# Altium PCB EE52_Digital_Oscilloscope.PcbDoc (part 1 of 5)
Units mil, origin at the board's own origin, x right, y up, seen from the top; angles counter-clockwise.
Board outline 7431 x 5662 mil, 2 copper layers (Top Layer, Bottom Layer); 305 components, 396 nets, 1532 pads, 389 vias.
Unrouted connection lines stored in the file: 2.
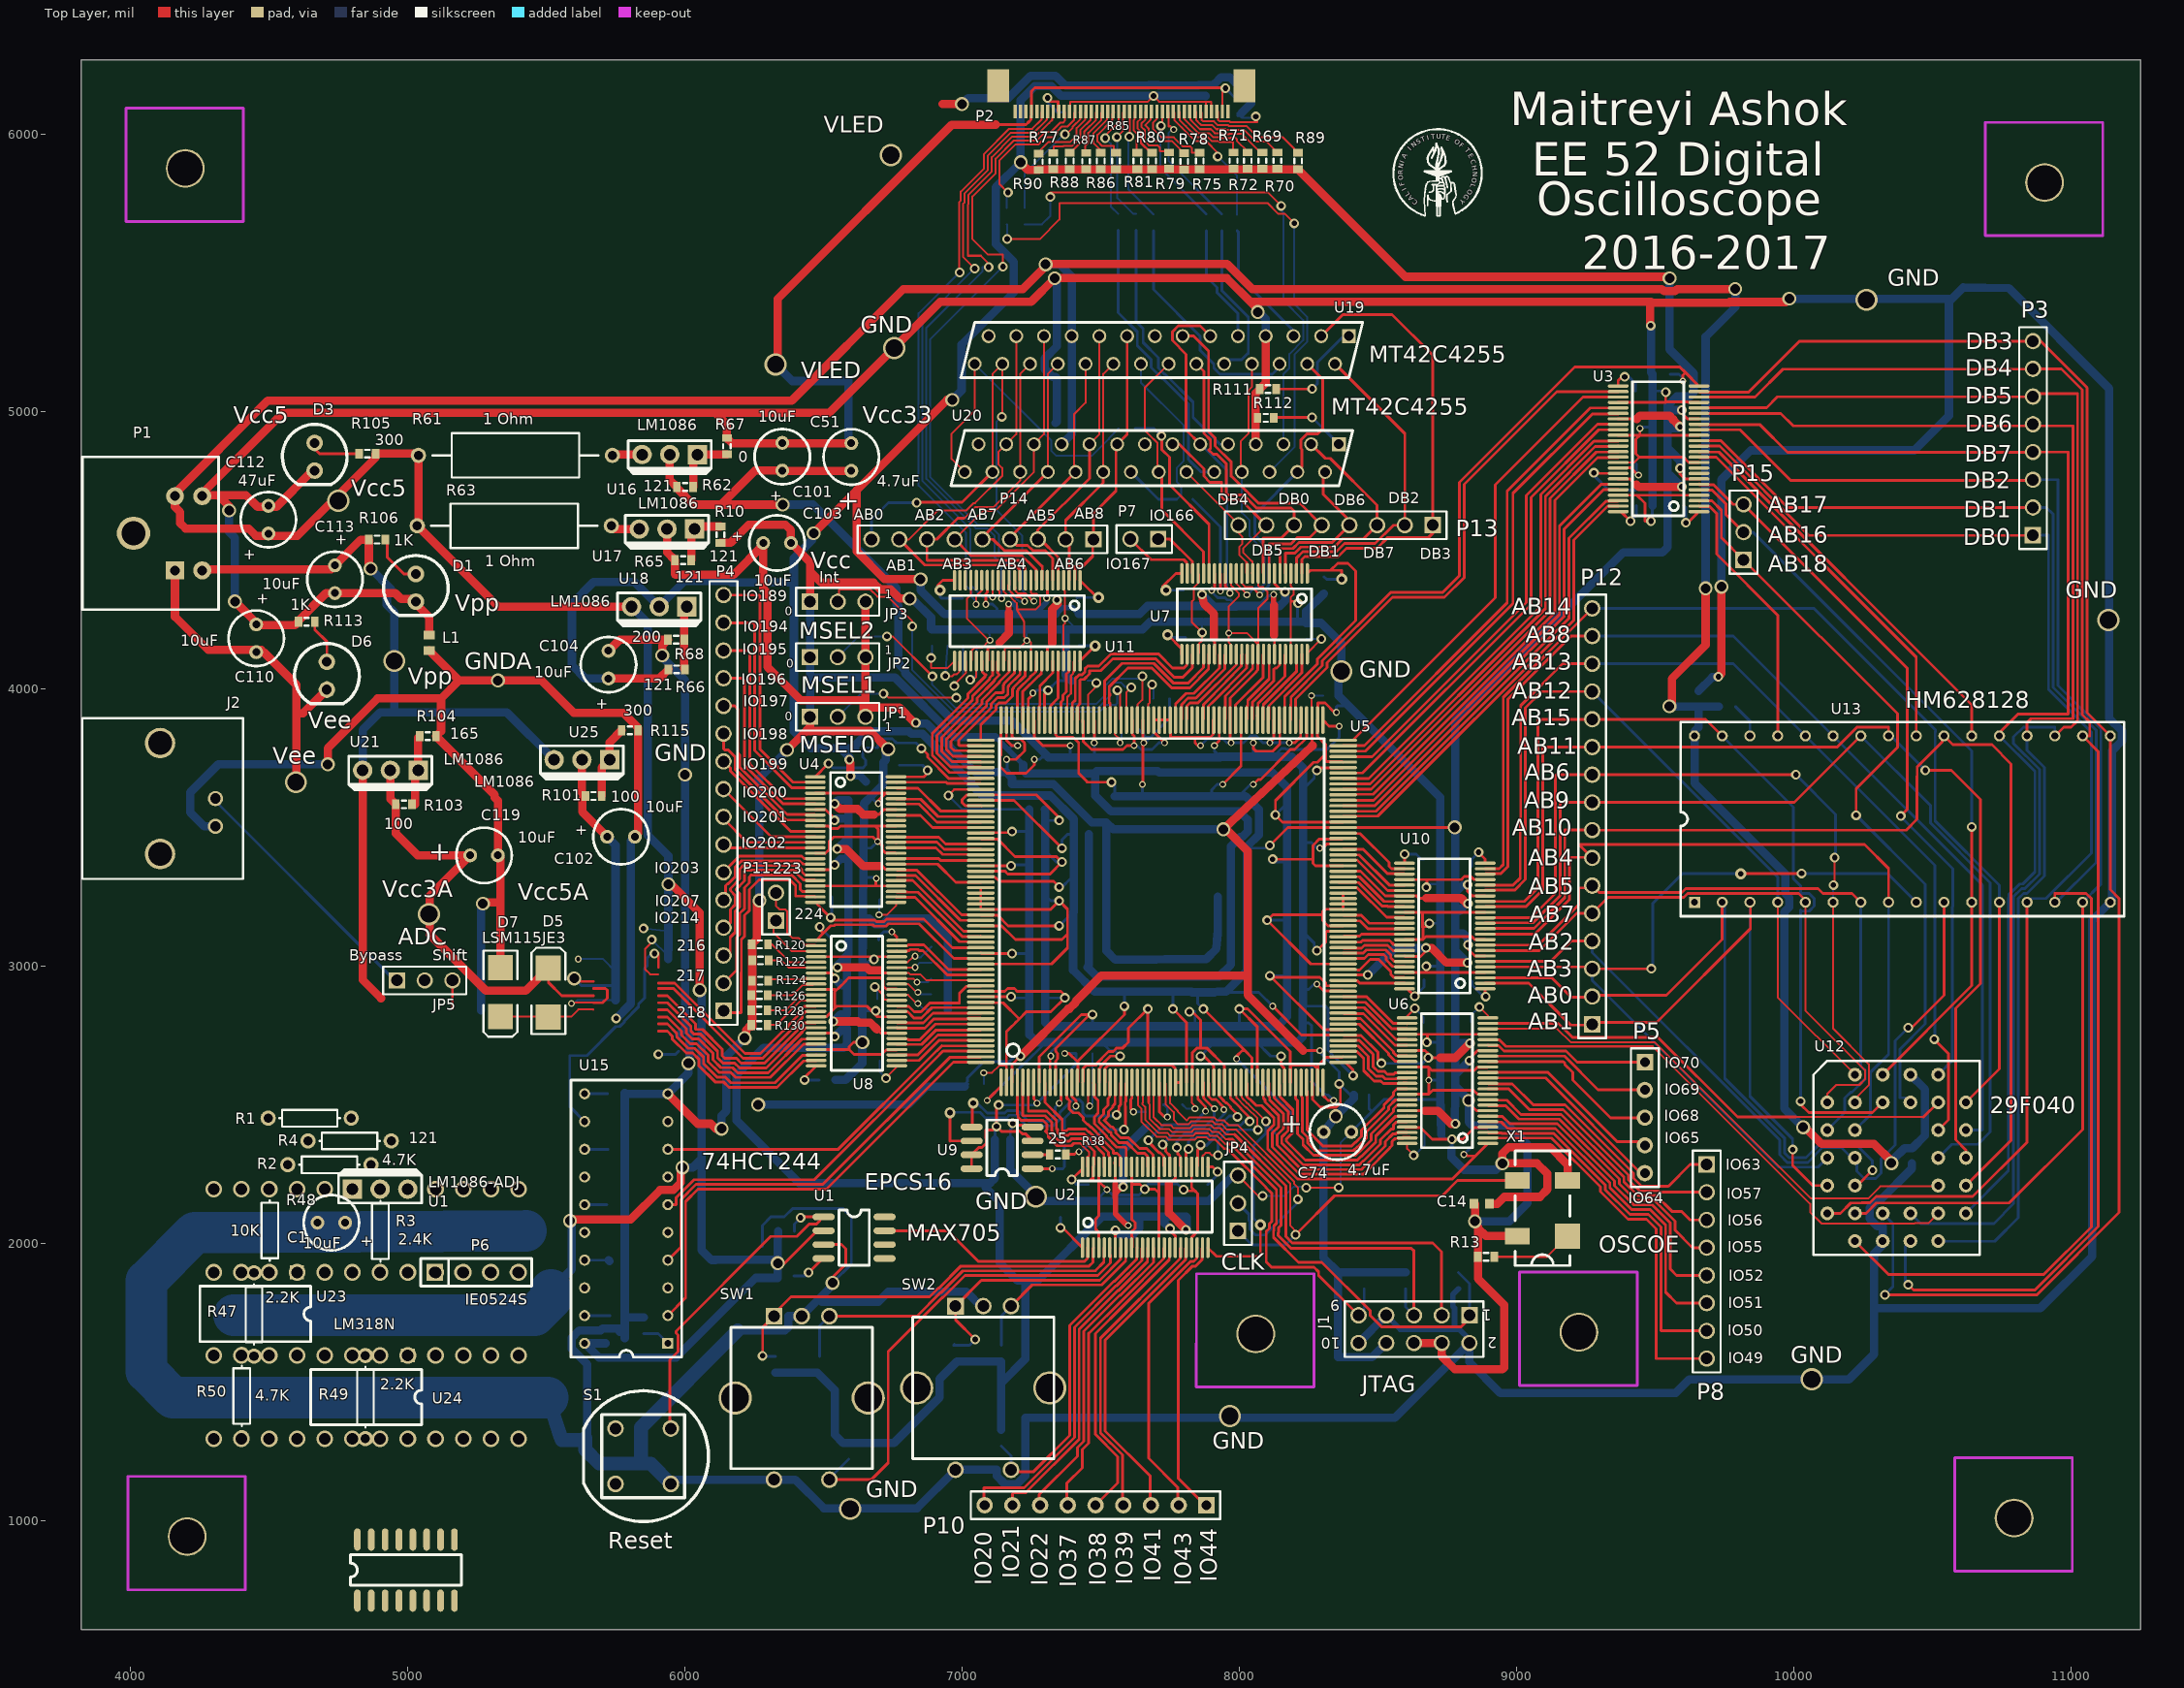
[diagram p0: Top Layer view]
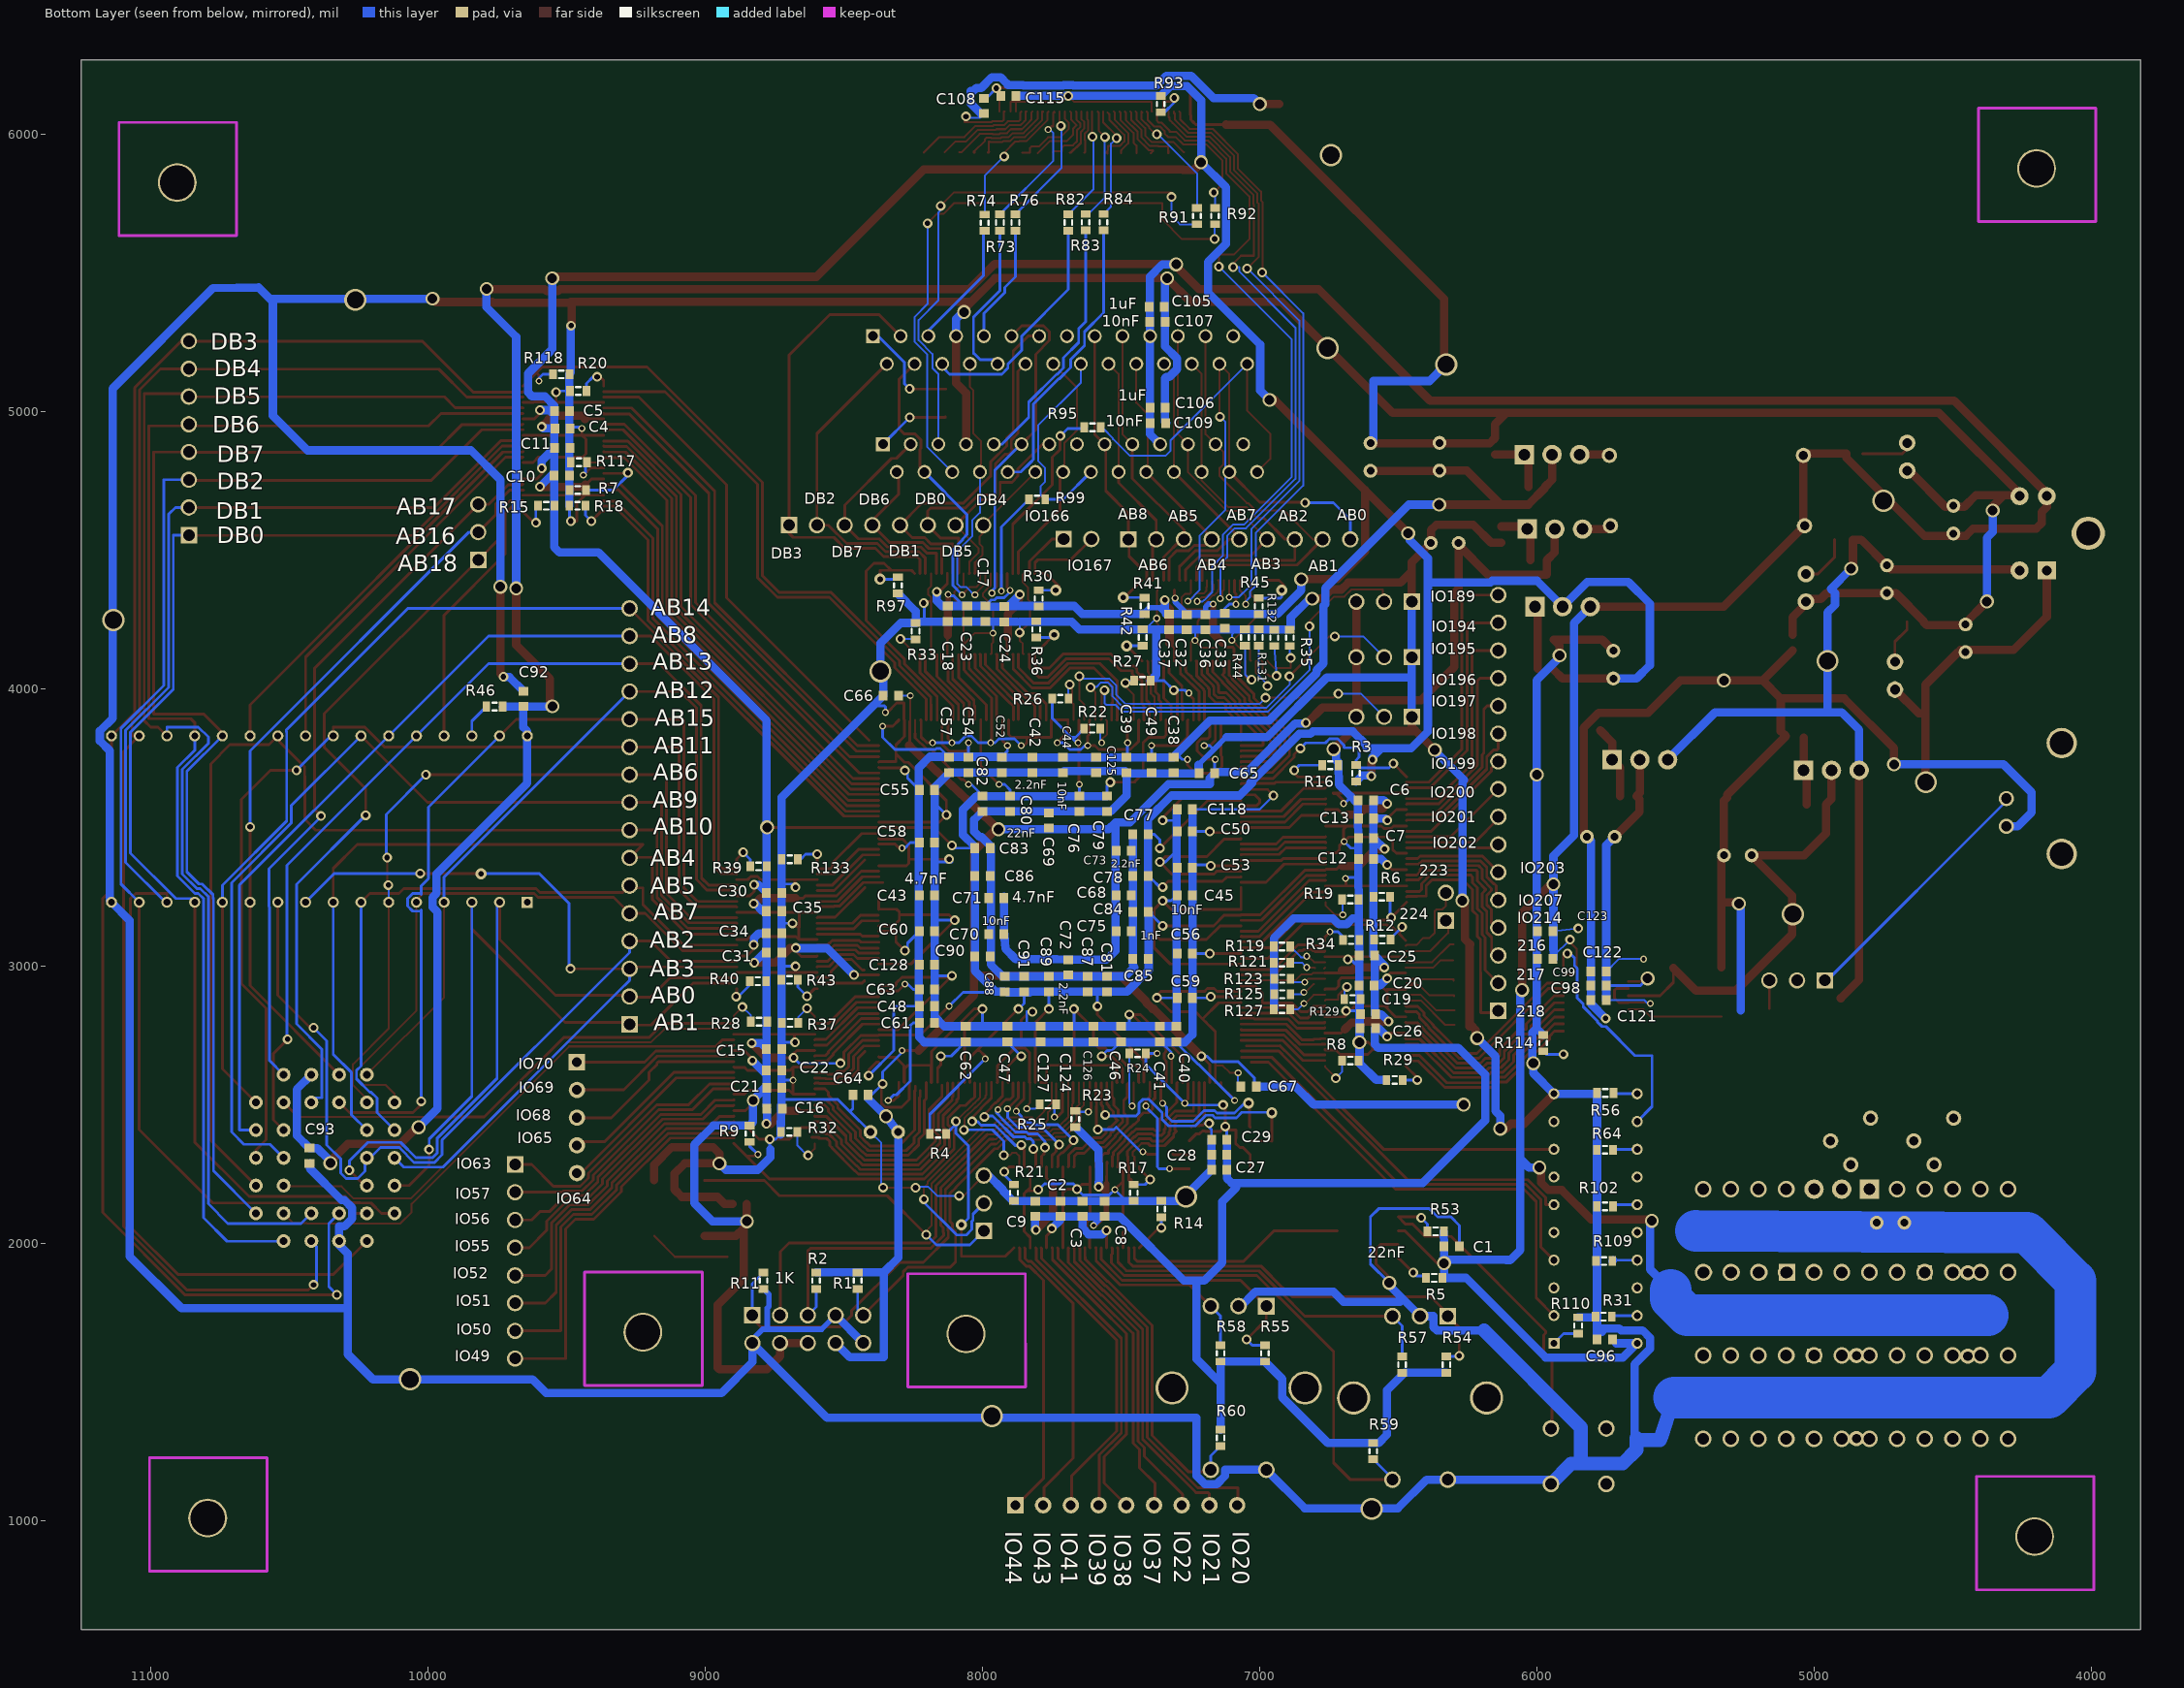
[diagram p1: Bottom Layer view, seen from below]

## Layer stack, top to bottom
Top Solder: solder mask 0.4, Solder Resist, Dk 3.5
Top Layer: signal copper 1.4
Dielectric 1: dielectric 12.6, FR-4, Dk 4.8
Bottom Layer: signal copper 1.4
Bottom Solder: solder mask 0.4, Solder Resist, Dk 3.5

## Board outline
3821,6269 11252,6269 11252,607 3821,607

## Design rules (kind name [scope] priority, off if disabled: settings)
Clearance [All] p1: gap=7
HoleSize [All] p1: absolutevalues=TRUE maxlimit=250 minlimit=20 maxpercent=80.000 minpercent=20.000
MinimumSolderMaskSliver [All] p1 off: minsoldermaskwidth=3
PlaneConnect [All] p1: planeconnectstyle=Relief reliefexpansion=15 reliefentries=4 reliefconductorwidth=10 reliefairgap=10
PolygonConnect [All] p1: connectstyle=Relief reliefconductorwidth=10 reliefentries=4 polygonreliefangle="90 Angle" airgapwidth=10
RoutingCorners [All] p1: cornerstyle=45-Degree minsetback=10 maxsetback=100
RoutingTopology [All] p1: topology=Daisy_Balanced
RoutingVias RoutingVias_1 [All] p1: holewidth=28 width=50 viastyle="Through Hole" minholewidth=15 minwidth=25 maxholewidth=28 maxwidth=50
RoutingVias [All] p2: holewidth=20 width=35 viastyle="Through Hole" minholewidth=15 minwidth=25 maxholewidth=28 maxwidth=50
SilkToSilkClearance [All] p1: silktosilkclearance=6
SilkToSolderMaskClearance [IsPad] p1 off: minsilkscreentomaskgap=3 clearancetoexposedcopper=TRUE
SolderMaskExpansion [All] p1: expansion=2.5
Width [All] p1: maxlimit=30 minlimit=7 preferedwidth=10
23 further rules are at their usual default settings.

## Classes and differential pairs
component class Memory: C92 C93 R46 U12 U13
component class EE52_Digital_Oscilloscope: C1 C2 C3 C4 C5 C6 C7 C8 C9 C10 C11 C12 C13 C14 C15 C16 C17 C18 C19 C20 C21 C22 C23 C24 C25 C26 C27 C28 C29 C30 C31 C32 C33 C34 C35 C36 C37 C38 C39 C40 C41 C42 C43 C44 C45 C46 C47 C48 C49 C50 C51 C52 C53 C54 C55 C56 C57 C58 C59 C60 C61 C62 C63 C64 C65 C66 C67 C68 C69 C70 C71 C72 C73 C74 C75 C76 C77 C78 C79 C80 C81 C82 C83 C84 C85 C86 C87 C88 C89 C90 C91 C101 C103 C104 C110 C112 C113 C118 C124 C125 C126 C127 C128 D1 D3 D6 J1 JP1 JP2 JP3 JP4 L1 P1 P3 P4 P5 P7 P8 P10 P11 P12 P13 P14 P15 R1 R2 R3 R4 R5 R6 R7 R8 R9 R10 R11 R12 R13 R14 R15 R16 R17 R18 R19 R20 R21 R22 R23 R24 R25 R26 R27 R28 R29 R30 R32 R33 R34 R35 R36 R37 R38 R39 R40 R41 R42 R43 R44 R45 R53 R61 R62 R63 R65 R66 R67 R68 R95 R97 R99 R105 R106 R113 R117 R118 R119 R120 R121 R122 R123 R124 R125 R126 R127 R128 R129 R130 R131 R132 R133 S1 U1 U2 U3 U4 U5 U6 U7 U8 U9 U10 U11 U16 U17 U18 X1
component class Input: C96 C98 C99 C102 C119 C121 C122 C123 D5 D7 J2 JP5 R31 R56 R64 R101 R102 R103 R104 R109 R110 R114 R115 U15 U21 U25
component class Output: C105 C106 C107 C108 C109 C115 P2 R54 R55 R57 R58 R59 R60 R69 R70 R71 R72 R73 R74 R75 R76 R77 R78 R79 R80 R81 R82 R83 R84 R85 R86 R87 R88 R89 R90 R91 R92 R93 R111 R112 SW1 SW2 U19 U20

## Components (designator, comment, footprint, x,y, rotation, side; value= is the part's Value field where it differs from the comment)
C1 "Cap" 1608[0603] 6307,1989 r0 bottom
C2 "Cap" 1608[0603] 7719,2124 r270 bottom
C3 "Cap" 1608[0603] 7639,2124 r270 bottom
C4 "Cap" 1608[0603] 9515,4939 r0 bottom
C5 "Cap" 1608[0603] 9517,5002 r0 bottom
C6 "Cap" 1608[0603] 6617,3598 r180 bottom
C7 "Cap" 1608[0603] 6616,3461 r180 bottom
C8 "Cap" 1608[0603] 7559,2124 r270 bottom
C9 "Cap" 1608[0603] 7809,2124 r270 bottom
C10 "Cap" 1608[0603] 9518,4769 r0 bottom
C11 "Cap" 1608[0603] 9516,4869 r0 bottom
C12 "Cap" 1608[0603] 6616,3386 r180 bottom
C13 "Cap" 1608[0603] 6616,3532 r180 bottom
C14 "Cap" 1608[0603] 8874,2142 r180 top
C15 "Cap" 1608[0603] 8752,2700 r0 bottom
C16 "Cap" 1608[0603] 8750,2485 r0 bottom
C17 "Cap" 1608[0603] 7990,4271 r90 bottom
C18 "Cap" 1608[0603] 8125,4271 r90 bottom
C19 "Cap" 1608[0603] 6609,2826 r180 bottom
C20 "Cap" 1608[0603] 6614,2930 r180 bottom
C21 "Cap" 1608[0603] 8751,2561 r0 bottom
C22 "Cap" 1608[0603] 8752,2624 r0 bottom
C23 "Cap" 1608[0603] 8055,4271 r90 bottom
C24 "Cap" 1608[0603] 7921,4269 r90 bottom
C25 "Cap" 1608[0603] 6613,3038 r180 bottom
C26 "Cap" 1608[0603] 6610,2775 r180 bottom
C27 "Cap" 1608[0603] 7146,2265 r180 bottom
C28 "Cap" 1608[0603] 7146,2319 r180 bottom
C29 "Cap" 1608[0603] 7146,2374 r180 bottom
C30 "Cap" 1608[0603] 8752,3263 r0 bottom
C31 "Cap" 1608[0603] 8752,3048 r0 bottom
C32 "Cap" 1608[0603] 7263,4240 r90 bottom
C33 "Cap" 1608[0603] 7125,4245 r90 bottom
C34 "Cap" 1608[0603] 8752,3118 r0 bottom
C35 "Cap" 1608[0603] 8752,3198 r0 bottom
C36 "Cap" 1608[0603] 7195,4240 r90 bottom
C37 "Cap" 1608[0603] 7327,4241 r90 bottom
C38 "Cap" 1608[0603] 7310,3725 r90 bottom
C39 "Cap" 1608[0603] 7480,3725 r90 bottom
C40 "Cap" 1608[0603] 7300,2755 r270 bottom
C41 "Cap" 1608[0603] 7360,2755 r270 bottom
C42 "Cap" 1608[0603] 7820,3725 r90 bottom
C43 "Cap" 1608[0603] 8200,3255 r0 bottom
C44 "Cap" 1608[0603] 7710,3725 r90 bottom
C45 "Cap" 1608[0603] 7270,3255 r180 bottom
C46 "Cap" 1608[0603] 7500,2755 r270 bottom
C47 "Cap" 1608[0603] 7910,2755 r270 bottom
C48 "Cap" 1608[0603] 8200,2855 r0 bottom
C49 "Cap" 1608[0603] 7390,3725 r90 bottom
C50 "Cap" 1608[0603] 7270,3485 r180 bottom
C51 "Cap" RB.1/.2 6600,4886 r270 top
C52 "Cap" 1608[0603] 7930,3725 r90 bottom
C53 "Cap" 1608[0603] 7270,3355 r180 bottom
C54 "Cap" 1608[0603] 8050,3725 r90 bottom
C55 "Cap" 1608[0603] 8200,3635 r0 bottom
C56 "Cap" 1608[0603] 7270,3045 r180 bottom
C57 "Cap" 1608[0603] 8120,3725 r90 bottom
C58 "Cap" 1608[0603] 8200,3445 r0 bottom
C59 "Cap" 1608[0603] 7270,2885 r180 bottom
C60 "Cap" 1608[0603] 8200,3125 r0 bottom
C61 "Cap" 1608[0603] 8200,2795 r0 bottom
C62 "Cap" 1608[0603] 8060,2755 r270 bottom
C63 "Cap" 1608[0603] 8200,2915 r0 bottom
C64 "Cap" 1608[0603] 8440,2535 r180 bottom
C65 "Cap" 1608[0603] 7190,3695 r180 bottom
C66 "Cap" 1608[0603] 8330,3975 r180 bottom
C67 "Cap" 1608[0603] 7040,2565 r180 bottom
C68 "Cap" 1608[0603] 7490,3255 r0 bottom
C69 "Cap" 1608[0603] 7760,3525 r270 bottom
C70 "Cap" 1608[0603] 7950,3115 r180 bottom
C71 "Cap" 1608[0603] 7950,3245 r180 bottom
C72 "Cap" 1608[0603] 7690,2995 r90 bottom
C73 "Cap" 1608[0603] 7490,3415 r0 bottom
C74 "Cap" RB.1/.2 8404,2401 r180 top
C75 "Cap" 1608[0603] 7490,3125 r0 bottom
C76 "Cap" 1608[0603] 7650,3585 r90 bottom
C77 "Cap" 1608[0603] 7430,3475 r180 bottom
C78 "Cap" 1608[0603] 7430,3325 r180 bottom
C79 "Cap" 1608[0603] 7550,3585 r90 bottom
C80 "Cap" 1608[0603] 7900,3585 r90 bottom
C81 "Cap" 1608[0603] 7550,2935 r270 bottom
C82 "Cap" 1608[0603] 8000,3585 r90 bottom
C83 "Cap" 1608[0603] 8000,3425 r0 bottom
C84 "Cap" 1608[0603] 7430,3195 r180 bottom
C85 "Cap" 1608[0603] 7430,3025 r180 bottom
C86 "Cap" 1608[0603] 8000,3325 r0 bottom
C87 "Cap" 1608[0603] 7620,2935 r270 bottom
C88 "Cap" 1608[0603] 7920,2935 r270 bottom
C89 "Cap" 1608[0603] 7760,2935 r270 bottom
C90 "Cap" 1608[0603] 8000,3035 r0 bottom
C91 "Cap" 1608[0603] 7850,2935 r270 bottom
C92 "Cap" 1608[0603] 9656,3964 r270 bottom
C93 "Cap" 1608[0603] 10428,2315.5 r90 bottom
C96 "Cap" 1608[0603] 5755,1653 r180 bottom
C98 "Cap" 1608[0603] 5777,2929 r180 bottom
C99 "Cap" 1608[0603] 5970,3025 r180 bottom
C101 "Cap Pol1" RB.1/.2 6351,4887 r270 top
C102 "Cap Pol1" RB.1/.2 5819,3466 r180 top
C103 "Cap Pol1" RB.1/.2 6382,4526 r180 top
C104 "Cap Pol1" RB.1/.2 5724,4137 r270 top
C105 "Cap" 1608[0603] 7371,5377 r0 bottom
C106 "Cap" 1608[0603] 7368,5014 r0 bottom
C107 "Cap" 1608[0603] 7369,5323 r0 bottom
C108 "Cap" 1608[0603] 7995,6102 r270 bottom
C109 "Cap" 1608[0603] 7367,4958 r0 bottom
C110 "Cap Pol1" RB.1/.2 4453,4132 r90 top
C112 "Cap Pol1" RB.1/.2 4674,2074 r0 top
C112 "Cap Pol1" RB.1/.2 4497,4660 r270 top
C113 "Cap Pol1" RB.1/.2 4737,4345 r90 top
C115 "Cap" 1608[0603] 7906,6138 r180 bottom
C118 "Cap" 1608[0603] 7270,3565 r180 bottom
C119 "Cap Pol1" RB.1/.2 5325,3399 r180 top
C121 "Cap" 1608[0603] 5777,2877 r180 bottom
C122 "Cap" 1608[0603] 5777,2980 r180 bottom
C123 "Cap" 1608[0603] 5970,3125 r180 bottom
C124 "Cap" 1608[0603] 7690,2755 r270 bottom
C125 "Cap" 1608[0603] 7590,3725 r90 bottom
C126 "Cap" 1608[0603] 7600,2755 r270 bottom
C127 "Cap" 1608[0603] 7790,2755 r270 bottom
C128 "Cap" 1608[0603] 8200,3005 r0 bottom
D1 "LED" LED-T13/4 5029,4314 r90 top
D3 "LED" LED-T13/4 4664,4787 r90 top
D5 "Diode" SMB 5507,2904 r90 top
D6 "LED" LED-T13/4 4708,3997 r90 top
D7 "Diode" SMB 5334,2906 r270 top
J1 "JTAG" HDR2X5 8830,1740 r180 top
J2 "BNC" AMP31-5540 4306,3604 r270 top
JP1 "CLK01" HDR1X3 6451,3899 r0 top
JP2 "CLK01" HDR1X3 6451,4114 r0 top
JP3 "CLK01" HDR1X3 6451,4314 r0 top
JP4 "CLK01" HDR1X3 7995,2044 r90 top
JP5 "CLK01" HDR1X3 4961,2948 r0 top
L1 "Ferrite Bead" FerriteBead 5077,4166 r90 top
P1 "MHDR1X4" MDIN4 4160,4427 r90 top
P2 "MHDR2X20" 40PinZIF 8019,6175 r180 top
P3 "Header 8" HDR1X8 10863,4554 r90 top
P4 "Header 16" HDR1X16 6139,2838 r90 top
P5 "Header 5" HDR1X5 9463,2653 r270 top
P7 "Header 2" HDR1X2 7707,4540 r180 top
P8 "Header 8" HDR1X8 9686,2284 r270 top
P10 "Header 9" HDR1X9#1 7881,1055 r180 top
P11 "Header 2" HDR1X2 6328,3164 r90 top
P12 "Header 16" HDR1X16 9273,2790 r90 top
P13 "Header 8" HDR1X8 8697,4590 r180 top
P14 "Header 9" HDR1X9#2 7473,4539 r180 top
P15 "Header 3" HDR1X3 9819,4465 r90 top
R1 "Res3" J1-0603 8450,1865 r90 bottom
R2 "Res3" J1-0603 8600,1865 r90 bottom
R3 "Res3" J1-0603 6652,3695 r270 bottom
R4 "Res3" J1-0603 8160,2395 r0 bottom
R5 "Res3" J1-0603 6370,1875 r0 bottom
R6 "Res3" J1-0603 6559,3250 r0 bottom
R7 "Res3" J1-0603 9460,4717 r0 bottom
R8 "Res3" J1-0603 6673,2659 r0 bottom
R9 "Res3" J1-0603 8840,2395 r90 bottom
R10 "Res3" J1-0603 6128,4556 r90 top
R11 "Res3" J1-0603 8790,1865 r90 bottom
R12 "Res3" J1-0603 6557,3095 r0 bottom
R13 "Res3" J1-0603 8890,1951 r0 top
R14 "Res3" J1-0603 7355,2123 r90 bottom
R15 "Res3" J1-0603 9574,4660 r180 bottom
R16 "Res3" J1-0603 6745,3724 r0 bottom
R17 "Res3" J1-0603 7454,2182 r90 bottom
R18 "Res3" J1-0603 9461,4660 r180 bottom
R19 "Res3" J1-0603 6673,3240 r0 bottom
R20 "Res3" J1-0603 9458,5074 r180 bottom
R21 "Res3" J1-0603 7886,2182 r90 bottom
R22 "Res3" J1-0603 7604,3856 r0 bottom
R23 "Res3" J1-0603 7665,2448 r270 bottom
R24 "Res3" J1-0603 7440,2685 r180 bottom
R25 "Res3" J1-0603 7764,2501 r180 bottom
R26 "Res3" J1-0603 7719,3964 r0 bottom
R27 "Res3" J1-0603 7423,4029 r0 bottom
R28 "Res3" J1-0603 8806,2799 r180 bottom
R29 "Res3" J1-0603 6513,2589 r0 bottom
R30 "Res3" J1-0603 7797,4326 r270 bottom
R31 "Res3" J1-0603 5759,1735 r180 bottom
R32 "Res3" J1-0603 8697,2402 r180 bottom
R33 "Res3" J1-0603 8241,4208 r270 bottom
R34 "Res3" J1-0603 6670,3094 r0 bottom
R35 "Res3" J1-0603 6891,4184 r270 bottom
R36 "Res3" J1-0603 7806,4214 r270 bottom
R37 "Res3" J1-0603 8694,2795 r180 bottom
R38 "Res3" J1-0603 7345,2320 r180 top
R39 "Res3" J1-0603 8808,3359 r180 bottom
R40 "Res3" J1-0603 8810,2945 r180 bottom
R41 "Res3" J1-0603 7415,4299 r270 bottom
R42 "Res3" J1-0603 7422,4185 r270 bottom
R43 "Res3" J1-0603 8696,2950 r180 bottom
R44 "Res3" J1-0603 7053,4185 r270 bottom
R45 "Res3" J1-0603 7003,4298 r90 bottom
R46 "Res3" J1-0603 9760,3936 r180 bottom
R53 "Res3" J1-0603 6365,2043 r0 bottom
R54 "Res3" J1-0603 6326,1562 r90 bottom
R55 "Res3" J1-0603 6981,1603 r90 bottom
R56 "Res3" J1-0603 5753,2542 r180 bottom
R57 "Res3" J1-0603 6486,1562 r90 bottom
R58 "Res3" J1-0603 7141,1603 r90 bottom
R59 "Res3" J1-0603 6590,1250 r270 bottom
R60 "Res3" J1-0603 7141,1298 r270 bottom
R61 "Res3" AXIAL-0.7 5388,4842 r0 top
R62 "Res3" J1-0603 6000,4728 r180 top
R63 "Res3" AXIAL-0.7 5384,4588 r0 top
R64 "Res3" J1-0603 5754,2337 r180 bottom
R65 "Res3" J1-0603 5993,4464 r180 top
R66 "Res3" J1-0603 5970,4070 r180 top
R67 "Res3" J1-0603 6151,4875 r270 top
R68 "Res3" J1-0603 5968,4177 r0 top
R69 "Res3" J1-0603 8083,5905 r90 top
R70 "Res3" J1-0603 8137,5905 r270 top
R71 "Res3" J1-0603 7979,5905 r90 top
R72 "Res3" J1-0603 8030,5905 r270 top
R73 "Res3" J1-0603 7937,5682 r90 bottom
R74 "Res3" J1-0603 7992,5681 r270 bottom
R75 "Res3" J1-0603 7857,5904 r90 top
R76 "Res3" J1-0603 7881,5682 r270 bottom
R77 "Res3" J1-0603 7329,5903 r90 top
R78 "Res3" J1-0603 7801,5902 r270 top
R79 "Res3" J1-0603 7746,5905 r90 top
R80 "Res3" J1-0603 7685,5904 r270 top
R81 "Res3" J1-0603 7632,5904 r90 top
R82 "Res3" J1-0603 7690,5682 r270 bottom
R83 "Res3" J1-0603 7628,5683 r90 bottom
R84 "Res3" J1-0603 7563,5683 r270 bottom
R85 "Res3" J1-0603 7555,5904 r90 top
R86 "Res3" J1-0603 7500,5904 r270 top
R87 "Res3" J1-0603 7447,5903 r90 top
R88 "Res3" J1-0603 7388,5904 r270 top
R89 "Res3" J1-0603 8212,5904 r90 top
R90 "Res3" J1-0603 7276,5901 r270 top
R91 "Res3" J1-0603 7226,5705 r90 bottom
R92 "Res3" J1-0603 7161,5705 r270 bottom
R93 "Res3" J1-0603 7357,6109 r90 bottom
R95 "Res3" J1-0603 7603,4943 r0 bottom
R97 "Res3" J1-0603 8305,4373 r90 bottom
R99 "Res3" J1-0603 7803,4683 r0 bottom
R101 "Res3" J1-0603 5670,3613 r180 top
R102 "Res3" J1-0603 5754,2133 r180 bottom
R103 "Res3" J1-0603 4986,3583 r180 top
R104 "Res3" J1-0603 5072,3829 r180 top
R105 "Res3" J1-0603 4854,4848 r180 top
R106 "Res3" J1-0603 4889,4538 r0 top
R109 "Res3" J1-0603 5757,1936 r180 bottom
R110 "Res3" J1-0603 5851,1703 r270 bottom
R111 "Res3" J1-0603 8103,5081 r180 top
R112 "Res3" J1-0603 8095,4977 r180 top
R113 "Res3" J1-0603 4635,4242 r180 top
R114 "Res3" J1-0603 5977,2722 r90 bottom
R115 "Res3" J1-0603 5801,3850 r180 top
R117 "Res3" J1-0603 9456,4817 r0 bottom
R118 "Res3" J1-0603 9519,5134 r0 bottom
R119 "Res3" J1-0603 6919,3070 r0 bottom
R120 "Res3" J1-0603 6270,3078 r0 top
R121 "Res3" J1-0603 6919,3012 r0 bottom
R122 "Res3" J1-0603 6272,3020 r0 top
R123 "Res3" J1-0603 6918,2954 r0 bottom
R124 "Res3" J1-0603 6271,2947 r0 top
R125 "Res3" J1-0603 6918,2898 r0 bottom
R126 "Res3" J1-0603 6269,2895 r0 top
R127 "Res3" J1-0603 6919,2844 r0 bottom
R128 "Res3" J1-0603 6268,2840 r0 top
R129 "Res3" J1-0603 6665,2881 r180 bottom
R130 "Res3" J1-0603 6268,2787 r0 top
R131 "Res3" J1-0603 7003,4185 r270 bottom
R132 "Res3" J1-0603 6947,4184 r270 bottom
R133 "Res3" J1-0603 8695,3385 r180 bottom
S1 "SW-PB" EG140X 5949,1132 r180 top
SW1 "SW-ROTARY&PB" ROTENCPB 6321,1737 r0 top
SW2 "SW-ROTARY&PB" ROTENCPB 6976,1773 r0 top
U1 "MAX705" SO-8 6500,2095 r0 top
U2 "74LVT16245" TSSOP48 7434,1984 r0 top
U3 "74LVT16245" TSSOP48 9658,4639 r90 top
U4 "74LVT16245" TSSOP48 6470,3682.44 r270 top
U5 "EP3C25Q240" PQFP240 7140,2580 r90 top
U6 "74LVT16245" TSSOP48 8896.53,2360.06 r90 top
U7 "74LVT16245" TSSOP48 8245,4416 r180 top
U8 "74LVT16245" TSSOP48 6473,3092.44 r270 top
U9 "EPCS16" SO-8 7254,2269 r180 top
U10 "74LVT16245" TSSOP48 8887,2918 r90 top
U11 "74LVT16245" TSSOP48 7425,4391.56 r180 top
U12 "29F040" PLCCS32 10021,2608 r0 top
U13 "628128" DIPS32 9642,3230 r90 top
U15 "74HCT244" DIPS20 5938,1639 r180 top
U16 "LM1086-ADJ" TO-220V 4800,2195 r0 top
U16 "LM1086-ADJ" TO-220V 6045,4845 r180 top
U17 "LM1086-ADJ" TO-220V 6035,4576 r180 top
U18 "LM1086-ADJ" TO-220V 6007,4296 r180 top
U19 "TC524259Z" ZIPS28 8395,5272 r270 top
U20 "TC524259Z" ZIPS28 8359,4882 r270 top
U21 "LM1086-ADJ" TO-220V 5037,3706 r180 top
U25 "LM1086-ADJ" TO-220V 5728,3744 r180 top
X1 "OSCOE" SG636PCE 9184,2026 r90 top
? "Comment" SO-16 4818,711 r90 top
? "Comment" axial-0.3#1 4847,1445 r270 top
? "Comment" axial-0.3#1 4401,1449 r270 top
? "Comment" axial-0.3#1 4445,1743 r270 top
? "Comment" axial-0.3#1 4502,2046 r270 top
? "Comment" axial-0.3#2 4717,2283 r0 top
? "Comment" axial-0.3#1 4790,2369 r180 top
? "Comment" axial-0.3#1 4646,2451 r180 top
? "Comment" sip4 5097,1895 r0 top
? "Comment" DIP8 5000,1595 r270 top
? "Comment" DIP8 4600,1895 r270 top
? "Comment" CITLOGO 8715,5859 r0 top
? "Comment" axial-0.3#1 4901,2043 r270 top

## Footprints (in the part's own frame and the unit in brackets; to place one, negate y for a bottom-side part, rotate by r counter-clockwise, add the part's x,y. Pads: shape width x height; smd on the part's side, far side on the other; paste and mask are expansions set on the pad)
40PinZIF [mm] "LCD Connector Footprint"
  rect 0.3x1.25 smd mask+0.05: 0(1.54,2.375) 1(2.04,2.375) 2(2.54,2.375) 3(3.04,2.375) 4(3.54,2.375) 5(4.04,2.375) 6(4.54,2.375) 7(5.04,2.375) 8(5.54,2.375) 9(6.04,2.375) 10(6.54,2.375) 11(7.04,2.375) 12(7.54,2.375) 13(8.04,2.375) 14(8.54,2.375) 15(9.04,2.375) 16(9.54,2.375) 17(10.04,2.375) 18(10.54,2.375) 19(11.04,2.375) 20(11.54,2.375) 21(12.04,2.375) 22(12.54,2.375) 23(13.04,2.375) 24(13.54,2.375) 25(14.04,2.375) 26(14.54,2.375) 27(15.04,2.375) 28(15.54,2.375) 29(16.04,2.375) 30(16.54,2.375) 31(17.04,2.375) 32(17.54,2.375) 33(18.04,2.375) 34(18.54,2.375) 35(19.04,2.375) 36(19.54,2.375) 37(20.04,2.375) 38(20.54,2.375) 39(21.04,2.375)
  rect 2x3 smd: 40(0,0) 40(22.58,0)
1608[0603] [mm] "Chip Capacitor, Body 1.6x0.8mm, IPC High Density"
  rect 0.8x0.9 smd: 1(-0.7,0) 2(0.7,0)
  body extent -0.87,-0.48 0.87,0.48, height 1.3
AMP31-5540 [mil]
  round 55 hole 38: 1(0,0) 2(100,0)
  round 110 hole 86: ""(-200,-200) ""(200,-200)
  silkscreen extent -290,-480 290,100
axial-0.3#1 [mm] "Axial Device, Thru-Hole; 2 Leads; 0.3 in Pin Spacing"
  round 1.4 hole 0.85: 1(-3.81,0) 2(3.81,0)
  silkscreen extent -2.77,-0.76 2.77,0.76
axial-0.3#2 [mm] "Axial Device, Thru-Hole; 2 Leads; 0.3 in Pin Spacing"
  round 1.4 hole 0.85: 2(3.81,0) ""(-3.81,0)
  silkscreen extent -2.77,-0.76 2.77,0.76
AXIAL-0.7 [mm] "Axial Device, Thru-Hole; 2 Leads; 0.7 in Pin Spacing"
  round 1.4 hole 0.85: 1(-8.89,0) 2(8.89,0)
  silkscreen extent -7.62,-2.03 7.62,2.03
CITLOGO [mil]
  silkscreen extent -159,-154 159,159
DIP8 [mil]
  rect 50x50 hole 35: 1(0,0)
  round 50 hole 35: 2(0,-100) 3(0,-200) 4(0,-300) 5(300,-300) 6(300,-200) 7(300,-100) 8(300,0)
  silkscreen extent 50,-350 250,50
DIPS20 [mil]
  rect 40x40 hole 25: 1(0,0)
  round 40 hole 25: 2(0,-100) 3(0,-200) 4(0,-300) 5(0,-400) 6(0,-500) 7(0,-600) 8(0,-700) 9(0,-800) 10(0,-900) 11(300,-900) 12(300,-800) 13(300,-700) 14(300,-600) 15(300,-500) 16(300,-400) 17(300,-300) 18(300,-200) 19(300,-100) 20(300,0)
  silkscreen extent -50,-950 350,50
DIPS32 [mil]
  rect 40x40 hole 25: 1(0,0)
  round 40 hole 25: 2(0,-100) 3(0,-200) 4(0,-300) 5(0,-400) 6(0,-500) 7(0,-600) 8(0,-700) 9(0,-800) 10(0,-900) 11(0,-1000) 12(0,-1100) 13(0,-1200) 14(0,-1300) 15(0,-1400) 16(0,-1500) 17(600,-1500) 18(600,-1400) 19(600,-1300) 20(600,-1200) 21(600,-1100) 22(600,-1000) 23(600,-900) 24(600,-800) 25(600,-700) 26(600,-600) 27(600,-500) 28(600,-400) 29(600,-300) 30(600,-200) 31(600,-100) 32(600,0)
  silkscreen extent -50,-1550 650,50
EG140X [mil]
  round 60 hole 42: 1(0,0) 2(0,-200) 3(200,0) 4(200,-200)
  silkscreen extent -136,-336 315,136
FerriteBead [mm] "Chip Ferrite Bead, 2-Leads, Body 1.60x0.80mm, IPC Medium Density"
  rect 0.78x1.02 smd: 1(-0.71,0) 2(0.71,0)
  body extent -0.9,-0.5 0.9,0.5, height 1
HDR1X2 [mm] "Connector; Header; 2 Position"
  rect 1.5x1.5 hole 1.067: 1(0,0)
  round 1.5 hole 1.067: 2(2.54,0)
  silkscreen extent -1.27,-1.27 3.81,1.27
HDR1X3 [mm] "Connector; Header; 3 Position"
  rect 1.5x1.5 hole 1.067: 1(0,0)
  round 1.5 hole 1.067: 2(2.54,0) 3(5.08,0)
  silkscreen extent -1.27,-1.27 6.35,1.27
HDR1X5 [mm] "Connector; Header; 5 Position"
  rect 1.5x1.5 hole 0.9: 1(0,0)
  round 1.5 hole 0.9: 2(2.54,0) 3(5.08,0) 4(7.62,0) 5(10.16,0)
  silkscreen extent -1.27,-1.27 11.43,1.27
HDR1X8 [mm] "Connector; Header; 8 Position"
  rect 1.5x1.5 hole 1.067: 1(0,0)
  round 1.5 hole 1.067: 2(2.54,0) 3(5.08,0) 4(7.62,0) 5(10.16,0) 6(12.7,0) 7(15.24,0) 8(17.78,0)
  silkscreen extent -1.27,-1.27 19.05,1.27
HDR1X9#1 [mm] "Connector; Header; 9 Position"
  rect 1.5x1.5 hole 0.9: 1(0,0)
  round 1.5 hole 0.9: 2(2.54,0) 3(5.08,0) 4(7.62,0) 5(10.16,0) 6(12.7,0) 7(15.24,0) 8(17.78,0) 9(20.32,0)
  silkscreen extent -1.27,-1.27 21.59,1.27
HDR1X9#2 [mm] "Connector; Header; 9 Position"
  rect 1.5x1.5 hole 1.067: 1(0,0)
  round 1.5 hole 1.067: 2(2.54,0) 3(5.08,0) 4(7.62,0) 5(10.16,0) 6(12.7,0) 7(15.24,0) 8(17.78,0) 9(20.32,0)
  silkscreen extent -1.27,-1.27 21.59,1.27
HDR1X16 [mm] "Connector; Header; 16 Position"
  rect 1.5x1.5 hole 1.067: 1(0,0)
  round 1.5 hole 1.067: 2(2.54,0) 3(5.08,0) 4(7.62,0) 5(10.16,0) 6(12.7,0) 7(15.24,0) 8(17.78,0) 9(20.32,0) 10(22.86,0) 11(25.4,0) 12(27.94,0) 13(30.48,0) 14(33.02,0) 15(35.56,0) 16(38.1,0)
  silkscreen extent -1.27,-1.27 39.37,1.27
HDR2X5 [mm] "Connector; Header; 5x2 Position"
  rect 1.5x1.5 hole 1.067: 1(0,0)
  round 1.5 hole 1.067: 2(0,2.54) 3(2.54,0) 4(2.54,2.54) 5(5.08,0) 6(5.08,2.54) 7(7.62,0) 8(7.62,2.54) 9(10.16,0) 10(10.16,2.54)
  silkscreen extent -1.27,-1.27 11.43,3.81
J1-0603 [mm] "Chip Resistor, Body 1.6x0.8mm, IPC High Density"
  rect 0.7x0.9 smd: 1(-0.75,0) 2(0.75,0)
  silkscreen extent -0.2,-0.35 0.2,0.35, body extent -0.85,-0.48 0.85,0.48, height 0.9
LED-T13/4 [mil]
  round 60 hole 35: 1(100,0) 2(0,0)
  silkscreen extent -50,-117 167,117
MDIN4 [mil]
  rect 65x65 hole 35: 1(0,0)
  round 65 hole 35: 2(267.72,0) 3(0,-98.42) 4(267.72,-98.42)
  round 120 hole 86: A(133.86,149.61)
  silkscreen extent -142,-157 409,335
PLCCS32 [mil]
  round 50 hole 28: 1(400,-100) 2(300,0) 3(300,-100) 4(200,0) 5(100,-100) 6(200,-100) 7(100,-200) 8(200,-200) 9(100,-300) 10(200,-300) 11(100,-400) 12(200,-400) 13(100,-500) 14(200,-600) 15(200,-500) 16(300,-600) 17(300,-500) 18(400,-600) 19(400,-500) 20(500,-600) 21(600,-500) 22(500,-500) 23(600,-400) 24(500,-400) 25(600,-300) 26(500,-300) 27(600,-200) 28(500,-200) 29(600,-100) 30(500,0) 31(500,-100) 32(400,0)
  silkscreen extent 50,-650 650,50
PQFP240 [mm]
  oval 2.54x0.3 smd: 1(0,0) 2(0,-0.5) 3(0,-1) 4(0,-1.5) 5(0,-2) 6(0,-2.5) 7(0,-3) 8(0,-3.5) 9(0,-4) 10(0,-4.5) 11(0,-5) 12(0,-5.5) 13(0,-6) 14(0,-6.5) 15(0,-7) 16(0,-7.5) 17(0,-8) 18(0,-8.5) 19(0,-9) 20(0,-9.5) 21(0,-10) 22(0,-10.5) 23(0,-11) 24(0,-11.5) 25(0,-12) 26(0,-12.5) 27(0,-13) 28(0,-13.5) 29(0,-14) 30(0,-14.5) 31(0,-15) 32(0,-15.5) 33(0,-16) 34(0,-16.5) 35(0,-17) 36(0,-17.5) 37(0,-18) 38(0,-18.5) 39(0,-19) 40(0,-19.5) 41(0,-20) 42(0,-20.5) 43(0,-21) 44(0,-21.5) 45(0,-22) 46(0,-22.5) 47(0,-23) 48(0,-23.5) 49(0,-24) 50(0,-24.5) 51(0,-25) 52(0,-25.5) 53(0,-26) 54(0,-26.5) 55(0,-27) 56(0,-27.5) 57(0,-28) 58(0,-28.5) 59(0,-29) 60(0,-29.5) 121(33.2,-29.5) 122(33.2,-29) 123(33.2,-28.5) 124(33.2,-28) 125(33.2,-27.5) 126(33.2,-27) 127(33.2,-26.5) 128(33.2,-26) 129(33.2,-25.5) 130(33.2,-25) 131(33.2,-24.5) 132(33.2,-24) 133(33.2,-23.5) 134(33.2,-23) 135(33.2,-22.5) 136(33.2,-22) 137(33.2,-21.5) 138(33.2,-21) 139(33.2,-20.5) 140(33.2,-20) 141(33.2,-19.5) 142(33.2,-19) 143(33.2,-18.5) 144(33.2,-18) 145(33.2,-17.5) 146(33.2,-17) 147(33.2,-16.5) 148(33.2,-16) 149(33.2,-15.5) 150(33.2,-15) 151(33.2,-14.5) 152(33.2,-14) 153(33.2,-13.5) 154(33.2,-13) 155(33.2,-12.5) 156(33.2,-12) 157(33.2,-11.5) 158(33.2,-11) 159(33.2,-10.5) 160(33.2,-10) 161(33.2,-9.5) 162(33.2,-9) 163(33.2,-8.5) 164(33.2,-8) 165(33.2,-7.5) 166(33.2,-7) 167(33.2,-6.5) 168(33.2,-6) 169(33.2,-5.5) 170(33.2,-5) 171(33.2,-4.5) 172(33.2,-4) 173(33.2,-3.5) 174(33.2,-3) 175(33.2,-2.5) 176(33.2,-2) 177(33.2,-1.5) 178(33.2,-1) 179(33.2,-0.5) 180(33.2,0)
  oval 0.3x2.54 smd: 61(1.85,-31.35) 62(2.35,-31.35) 63(2.85,-31.35) 64(3.35,-31.35) 65(3.85,-31.35) 66(4.35,-31.35) 67(4.85,-31.35) 68(5.35,-31.35) 69(5.85,-31.35) 70(6.35,-31.35) 71(6.85,-31.35) 72(7.35,-31.35) 73(7.85,-31.35) 74(8.35,-31.35) 75(8.85,-31.35) 76(9.35,-31.35) 77(9.85,-31.35) 78(10.35,-31.35) 79(10.85,-31.35) 80(11.35,-31.35) 81(11.85,-31.35) 82(12.35,-31.35) 83(12.85,-31.35) 84(13.35,-31.35) 85(13.85,-31.35) 86(14.35,-31.35) 87(14.85,-31.35) 88(15.35,-31.35) 89(15.85,-31.35) 90(16.35,-31.35) 91(16.85,-31.35) 92(17.35,-31.35) 93(17.85,-31.35) 94(18.35,-31.35) 95(18.85,-31.35) 96(19.35,-31.35) 97(19.85,-31.35) 98(20.35,-31.35) 99(20.85,-31.35) 100(21.35,-31.35) 101(21.85,-31.35) 102(22.35,-31.35) 103(22.85,-31.35) 104(23.35,-31.35) 105(23.85,-31.35) 106(24.35,-31.35) 107(24.85,-31.35) 108(25.35,-31.35) 109(25.85,-31.35) 110(26.35,-31.35) 111(26.85,-31.35) 112(27.35,-31.35) 113(27.85,-31.35) 114(28.35,-31.35) 115(28.85,-31.35) 116(29.35,-31.35) 117(29.85,-31.35) 118(30.35,-31.35) 119(30.85,-31.35) 120(31.35,-31.35) 181(31.35,1.85) 182(30.85,1.85) 183(30.35,1.85) 184(29.85,1.85) 185(29.35,1.85) 186(28.85,1.85) 187(28.35,1.85) 188(27.85,1.85) 189(27.35,1.85) 190(26.85,1.85) 191(26.35,1.85) 192(25.85,1.85) 193(25.35,1.85) 194(24.85,1.85) 195(24.35,1.85) 196(23.85,1.85) 197(23.35,1.85) 198(22.85,1.85) 199(22.35,1.85) 200(21.85,1.85) 201(21.35,1.85) 202(20.85,1.85) 203(20.35,1.85) 204(19.85,1.85) 205(19.35,1.85) 206(18.85,1.85) 207(18.35,1.85) 208(17.85,1.85) 209(17.35,1.85) 210(16.85,1.85) 211(16.35,1.85) 212(15.85,1.85) 213(15.35,1.85) 214(14.85,1.85) 215(14.35,1.85) 216(13.85,1.85) 217(13.35,1.85) 218(12.85,1.85) 219(12.35,1.85) 220(11.85,1.85) 221(11.35,1.85) 222(10.85,1.85) 223(10.35,1.85) 224(9.85,1.85) 225(9.35,1.85) 226(8.85,1.85) 227(8.35,1.85) 228(7.85,1.85) 229(7.35,1.85) 230(6.85,1.85) 231(6.35,1.85) 232(5.85,1.85) 233(5.35,1.85) 234(4.85,1.85) 235(4.35,1.85) 236(3.85,1.85) 237(3.35,1.85) 238(2.85,1.85) 239(2.35,1.85) 240(1.85,1.85)
  silkscreen extent 1.7,-29.63 31.5,0.15
RB.1/.2 [mil]
  round 50 hole 28: 1(100,0) 2(0,0)
  silkscreen extent -50,-100 150,100
ROTENCPB [mil]
  rect 60x60 hole 42: 1(0,0)
  round 60 hole 42: 2(100,0) 3(200,0) 4(200,-590) 5(0,-590)
  round 120 hole 100: ""(-140,-295) ""(340,-295)
  silkscreen extent -155,-550 355,-40
SG636PCE [mm]
  rect 2.3x2.3 smd: 1(0,0)
  rect 1.5x2.3 smd: 2(5.1,0) 3(5.1,4.6) 4(0,4.6)
  silkscreen extent -2.7,-0.2 7.8,4.8
sip4 [mil]
  rect 60x60 hole 40: 1(0,0)
  round 60 hole 40: 2(100,0) 3(200,0) 4(300,0)
  silkscreen extent -50,-50 350,50
SMB [mm] "DO-214-AA/SMB; 2 C-Bend Leads; Body 5.3 x 3.6 mm, inc. leads (LxW)"
  rect 2.3x2.3 smd: 1(-2.25,0) 2(2.25,0)
  silkscreen extent -3.8,-1.55 4.1,1.55
SO-8 [mil]
  oval 80x24 smd: 1(0,0) 2(0,-50) 3(0,-100) 4(0,-150) 5(220,-150) 6(220,-100) 7(220,-50) 8(220,0)
  silkscreen extent 55,-175 165,25
SO-16 [mil]
  oval 80x24 smd: 1(0,0) 2(0,-50) 3(0,-100) 4(0,-150) 5(0,-200) 6(0,-250) 7(0,-300) 8(0,-350) 9(220,-350) 10(220,-300) 11(220,-250) 12(220,-200) 13(220,-150) 14(220,-100) 15(220,-50) 16(220,0)
  silkscreen extent 55,-375 165,25
TO-220V [mil]
  rect 70x70 hole 42: 1(0,0)
  round 70 hole 42: 2(100,0) 3(200,0)
  silkscreen extent -50,-50 250,70
TSSOP48 [mm]
  oval 0.3x1.9 smd: 1(0,0) 2(0.5,0) 3(1,0) 4(1.5,0) 5(2,0) 6(2.5,0) 7(3,0) 8(3.5,0) 9(4,0) 10(4.5,0) 11(5,0) 12(5.5,0) 13(6,0) 14(6.5,0) 15(7,0) 16(7.5,0) 17(8,0) 18(8.5,0) 19(9,0) 20(9.5,0) 21(10,0) 22(10.5,0) 23(11,0) 24(11.5,0) 25(11.5,7.4) 26(11,7.4) 27(10.5,7.4) 28(10,7.4) 29(9.5,7.4) 30(9,7.4) 31(8.5,7.4) 32(8,7.4) 33(7.5,7.4) 34(7,7.4) 35(6.5,7.4) 36(6,7.4) 37(5.5,7.4) 38(5,7.4) 39(4.5,7.4) 40(4,7.4) 41(3.5,7.4) 42(3,7.4) 43(2.5,7.4) 44(2,7.4) 45(1.5,7.4) 46(1,7.4) 47(0.5,7.4) 48(0,7.4)
  silkscreen extent -0.4,1.4 11.9,6.1
ZIPS28 [mil]
  rect 50x50 hole 35: 1(0,0)
  round 50 hole 35: 2(100,-50) 3(0,-100) 4(100,-150) 5(0,-200) 6(100,-250) 7(0,-300) 8(100,-350) 9(0,-400) 10(100,-450) 11(0,-500) 12(100,-550) 13(0,-600) 14(100,-650) 15(0,-700) 16(100,-750) 17(0,-800) 18(100,-850) 19(0,-900) 20(100,-950) 21(0,-1000) 22(100,-1050) 23(0,-1100) 24(100,-1150) 25(0,-1200) 26(100,-1250) 27(0,-1300) 28(100,-1350)
  silkscreen extent -50,-1400 150,50

## Part data
C1 C2 C3 C4 C5 C6 C7 C8 C9 C10 C11 C12 C13 C14 C15 C16 C17 C18 C19 C20 C21 C22 C23 C24 C25 C26 C27 C28 C29 C30 C31 C32 C33 C34 C35 C36 C37 C38 C39 C40 C41 C42 C43 C44 C45 C46 C47 C48 C49 C50 C51 C52 C53 C54 C55 C56 C57 C58 C59 C60 C61 C62 C63 C64 C65 C66 C67 C68 C69 C70 C71 C72 C73 C74 C75 C76 C77 C78 C79 C80 C81 C82 C83 C84 C85 C86 C87 C88 C89 C90 C91 C92 C93 C96 C98 C99 C105 C106 C107 C108 C109 C115 C118 C121 C122 C123 C124 C125 C126 C127 C128: "Capacitor"
C101 C102 C103 C104 C110 C112 C112 C113 C119: "Polarized Capacitor (Radial)"
D1 D3 D6: "LED SMT"
D5 D7: "LSM115JE3/TR13"
J1: library part CON10
J2: "BNC Connector"
JP1 JP2 JP3 JP4 JP5: library part JUMPER3SM
L1: library part Inductor, "Inductor"
P1: "Header, 4-Pin"
P2: "Header, 20-Pin, Dual row"
P3 P8 P13: "Header, 8-Pin"
P4 P12: "Header, 16-Pin"
P5: "Header, 5-Pin"
P7 P11: "Header, 2-Pin"
P10 P14: "Header, 9-Pin"
P15: "Header, 3-Pin"
R1 R2 R3 R4 R5 R6 R7 R8 R9 R10 R11 R12 R13 R14 R15 R16 R17 R18 R19 R20 R21 R22 R23 R24 R25 R26 R27 R28 R29 R30 R31 R32 R33 R34 R35 R36 R37 R38 R39 R40 R41 R42 R43 R44 R45 R46 R53 R54 R55 R56 R57 R58 R59 R60 R61 R62 R63 R64 R65 R66 R67 R68 R69 R70 R71 R72 R73 R74 R75 R76 R77 R78 R79 R80 R81 R82 R83 R84 R85 R86 R87 R88 R89 R90 R91 R92 R93 R95 R97 R99 R101 R102 R103 R104 R105 R106 R109 R110 R111 R112 R113 R114 R115 R117 R118 R119 R120 R121 R122 R123 R124 R125 R126 R127 R128 R129 R130 R131 R132 R133: "Resistor"
S1: "Switch"
SW1 SW2: "Rotary Encoder with Built-In Push Button"
U1: "Maxim uP Supervisory Circuit"
U2 U3 U4 U6 U7 U8 U10 U11: "16-Bit Bus Transceiver"
U5: "Cyclone III EP3C-25 FPGA PQFP240"
U9: "Altera Serial Configuration Device"
U12: "4 Megabit (512K x 8) CMOS Uniform Sector Flash Memory"
U13: "1 M SRAM (128-kword x 8-bit)"
U15: "Octal Buffer"
U16 U16 U17 U18 U21 U25: library part LM1086, "1.5A Low Dropout Positive Regulator"
U19 U20: "CMOS 262,144 Words x 4-Bits Multiport DRAM"
X1: "Oscillator with Active High Output Enable"

## Free pads (board coordinates)
  round 140 hole 125: 4(4197,5877) 4(4204,942) 4(8059,1673) 4(9225,1679) 4(10795,1009) 4(10905,5826)

## Via types
v1: diameter 35, hole 20, Top Layer to Bottom Layer, 188 vias
v2: diameter 25, hole 15, Top Layer to Bottom Layer, 82 vias
v3: diameter 60, hole 42, Top Layer to Bottom Layer, 48 vias
v4: diameter 50, hole 35, Top Layer to Bottom Layer, 46 vias
v5: diameter 80, hole 62, Top Layer to Bottom Layer, 14 vias
v6: diameter 40, hole 20, Top Layer to Bottom Layer, 10 vias
v7: diameter 45, hole 30, Top Layer to Bottom Layer, 1 vias

## Nets (pads, with @x,y where several pads share a name; then routed paths per layer and width w, separated by ;. In a path a pad name is that pad's centre, name@x,y a point inside that pad or via, vN(x,y) a via of type N, cw(c..) or ccw(c..) an arc to the next point about the centre after c; other vN are vias at no path point)
ADC_BYPASS: J2.1 JP5.1 | length 927.7
  Bottom Layer w7: J2.1@4297,3604 J2.1@4301.5,3599.5
  Bottom Layer w10: J2.1@4301.5,3599.5 JP5.1@4953,2948
ADC_SHIFTED: JP5.3 | length 102
  Top Layer w7: 5161,2846 JP5.3@5161,2948
ADCCLK: U15.12 | length 873
  Top Layer w10: v1(5890,3045) 5904,3045 5904,2995.5
  Bottom Layer w10: U15.12@5638,2439 5584,2493 5584,2677 5646,2677 5750.5,2781.5 5764.22,2781.5 5781.5,2798.78 5781.5,2802.32 5832.31,2853.12 5832.31,2863.31 5854,2885 5854,2991.26 5864,3001.26 5864,3029 5885,3050 v1(5890,3045)
BLUE0: R91.1 U20.5 | length 1948.5
  Top Layer w7: v1@7318,5791 8102,5791 v1(8151,5742)
  Bottom Layer w7: R91.1@7226,5675.47 7287.47,5675.47 7318,5706 v1(7318,5774) ; v1(8151,5742) 8151,5726 8159,5718 8159,5401.42 8230.5,5329.92 8230.5,5257.3 8180.5,5207.3 8180.5,5157.3 8159,5135.8 U20.5@8159,4882
BLUE1: R92.2 U20.6 | length 2181
  Top Layer w7: v1(7162,5622) 7280,5622 7351,5693 7351,5752 8101.4,5752 8139.4,5714 8163,5714 v1(8198,5679)
  Bottom Layer w7: R92.2@7161,5675.47 7162,5674.47 v1(7162,5622) ; U20.6@8109,4782 8109.2,4782 8200,4872.8 8200,5207 8244.5,5251.5 8244.5,5341.5 8198,5388 v1(8198,5679)
CLK0: JP4.1 U5.31 X1.3 | length 1981.4
  Top Layer w7: U5.31@7733.83,2576.72 7733.83,2501.77 7763,2472.6 7763,2445.21 7779.21,2429 7815.21,2429 7825.21,2439 7903.79,2439 7912.69,2430.1 7935.71,2430.1 7955.82,2410 7989.04,2410 8183,2216.04 8183,2064 v1@8209.5,2037.5
  Top Layer w10: v1(8203,2031) 8209.5,2037.5 8343.5,2171.5 8732.01,2171.5 8787.3,2226.79 X1.3@9002.9,2226.79
  Bottom Layer w10: JP4.1@7995,2044 8045,1994 8166,1994 v1(8203,2031)
CLK1: JP4.2 U5.32 | length 1068.1
  Top Layer w7: U5.32@7750.24,2580 7750.24,2505.16 7777,2478.4 7777,2475.41 7809.41,2443 7819.41,2453 7909.59,2453 7918.49,2444.1 7941.51,2444.1 7942.61,2443 7945,2443 7961.5,2426.5 7993.5,2426.5 8197,2223 8197,2214.57 8211,2200.57 v1(8211,2159)
  Bottom Layer w10: JP4.2@7995,2144 8034,2105 8034,2082.96 8038,2078.96 8038,2050 8058,2030 8093,2030 v1@8216.5,2153.5
DATA0: R38.1 U5.24 | length 422.7
  Top Layer w10: R38.1@7372.53,2321 7405.17,2321 7414.28,2330.11 v2(7421.35,2330.11) ; v1@7582.5,2415 7588.5,2421 7588.5,2494.22 7588.29,2494.43 7588.29,2508.58 7590.98,2511.27 U5.24@7590.98,2578.22
  Bottom Layer w10: v2(7421.35,2330.11) 7428.11,2330.11 7517,2419 7526,2410 v1(7584,2410)
DATA1: U5.12 U9.5 | length 556.6
  Top Layer w10: U9.5@7034,2419 7036,2421 7036,2502 7039,2505 v6(7040,2505) ; v2(7350,2505) 7356.54,2511.54 U5.12@7356.54,2580
  Bottom Layer w10: v6(7040,2505) 7055,2505 7091,2469 7153.24,2469 7162.74,2478.5 7201.26,2478.5 7239.76,2440 7315.92,2440 7335,2459.08 7335,2490 v2(7350,2505)
DCLK: U5.23 U9.6 | length 1045.9
  Top Layer w10: v6(6956,2471) 6956,2368 6957,2369 U9.6@7034,2369 ; v1@7550,2464 7545.42,2468.58 7548.34,2471.5 7555.96,2471.5 7565.5,2481.04 7565.5,2493.26 7568.61,2496.37 7568.61,2496.61 7571.29,2499.29 U5.23@7571.29,2578.22 ; v1(7557,2463) v1@7559,2463
  Bottom Layer w10: v6(6956,2471) 6957,2472 7063.96,2472 7083.96,2452 7160.28,2452 7169.78,2461.5 7194.22,2461.5 7232.72,2423 7328.25,2423 7352,2446.75 7352,2471.65 7399.85,2519.5 7420.15,2519.5 7434.5,2505.15 7434.5,2470.5 7446,2459 7547.25,2459 7551.25,2463 v1(7557,2463)
DEV_CLR: U5.145
DEV_OE: U5.144